# Altium PCB Light Panel.PcbDoc (part 2 of 2)
Units mm, origin at the board's own origin, x right, y up, seen from the top; angles counter-clockwise.
Board outline 300 x 185 mm, 2 copper layers (Top Layer, Bottom Layer), stack 1.671 mm thick; 278 components, 216 nets, 569 pads, 0 vias.
Unrouted connection lines stored in the file: 11.
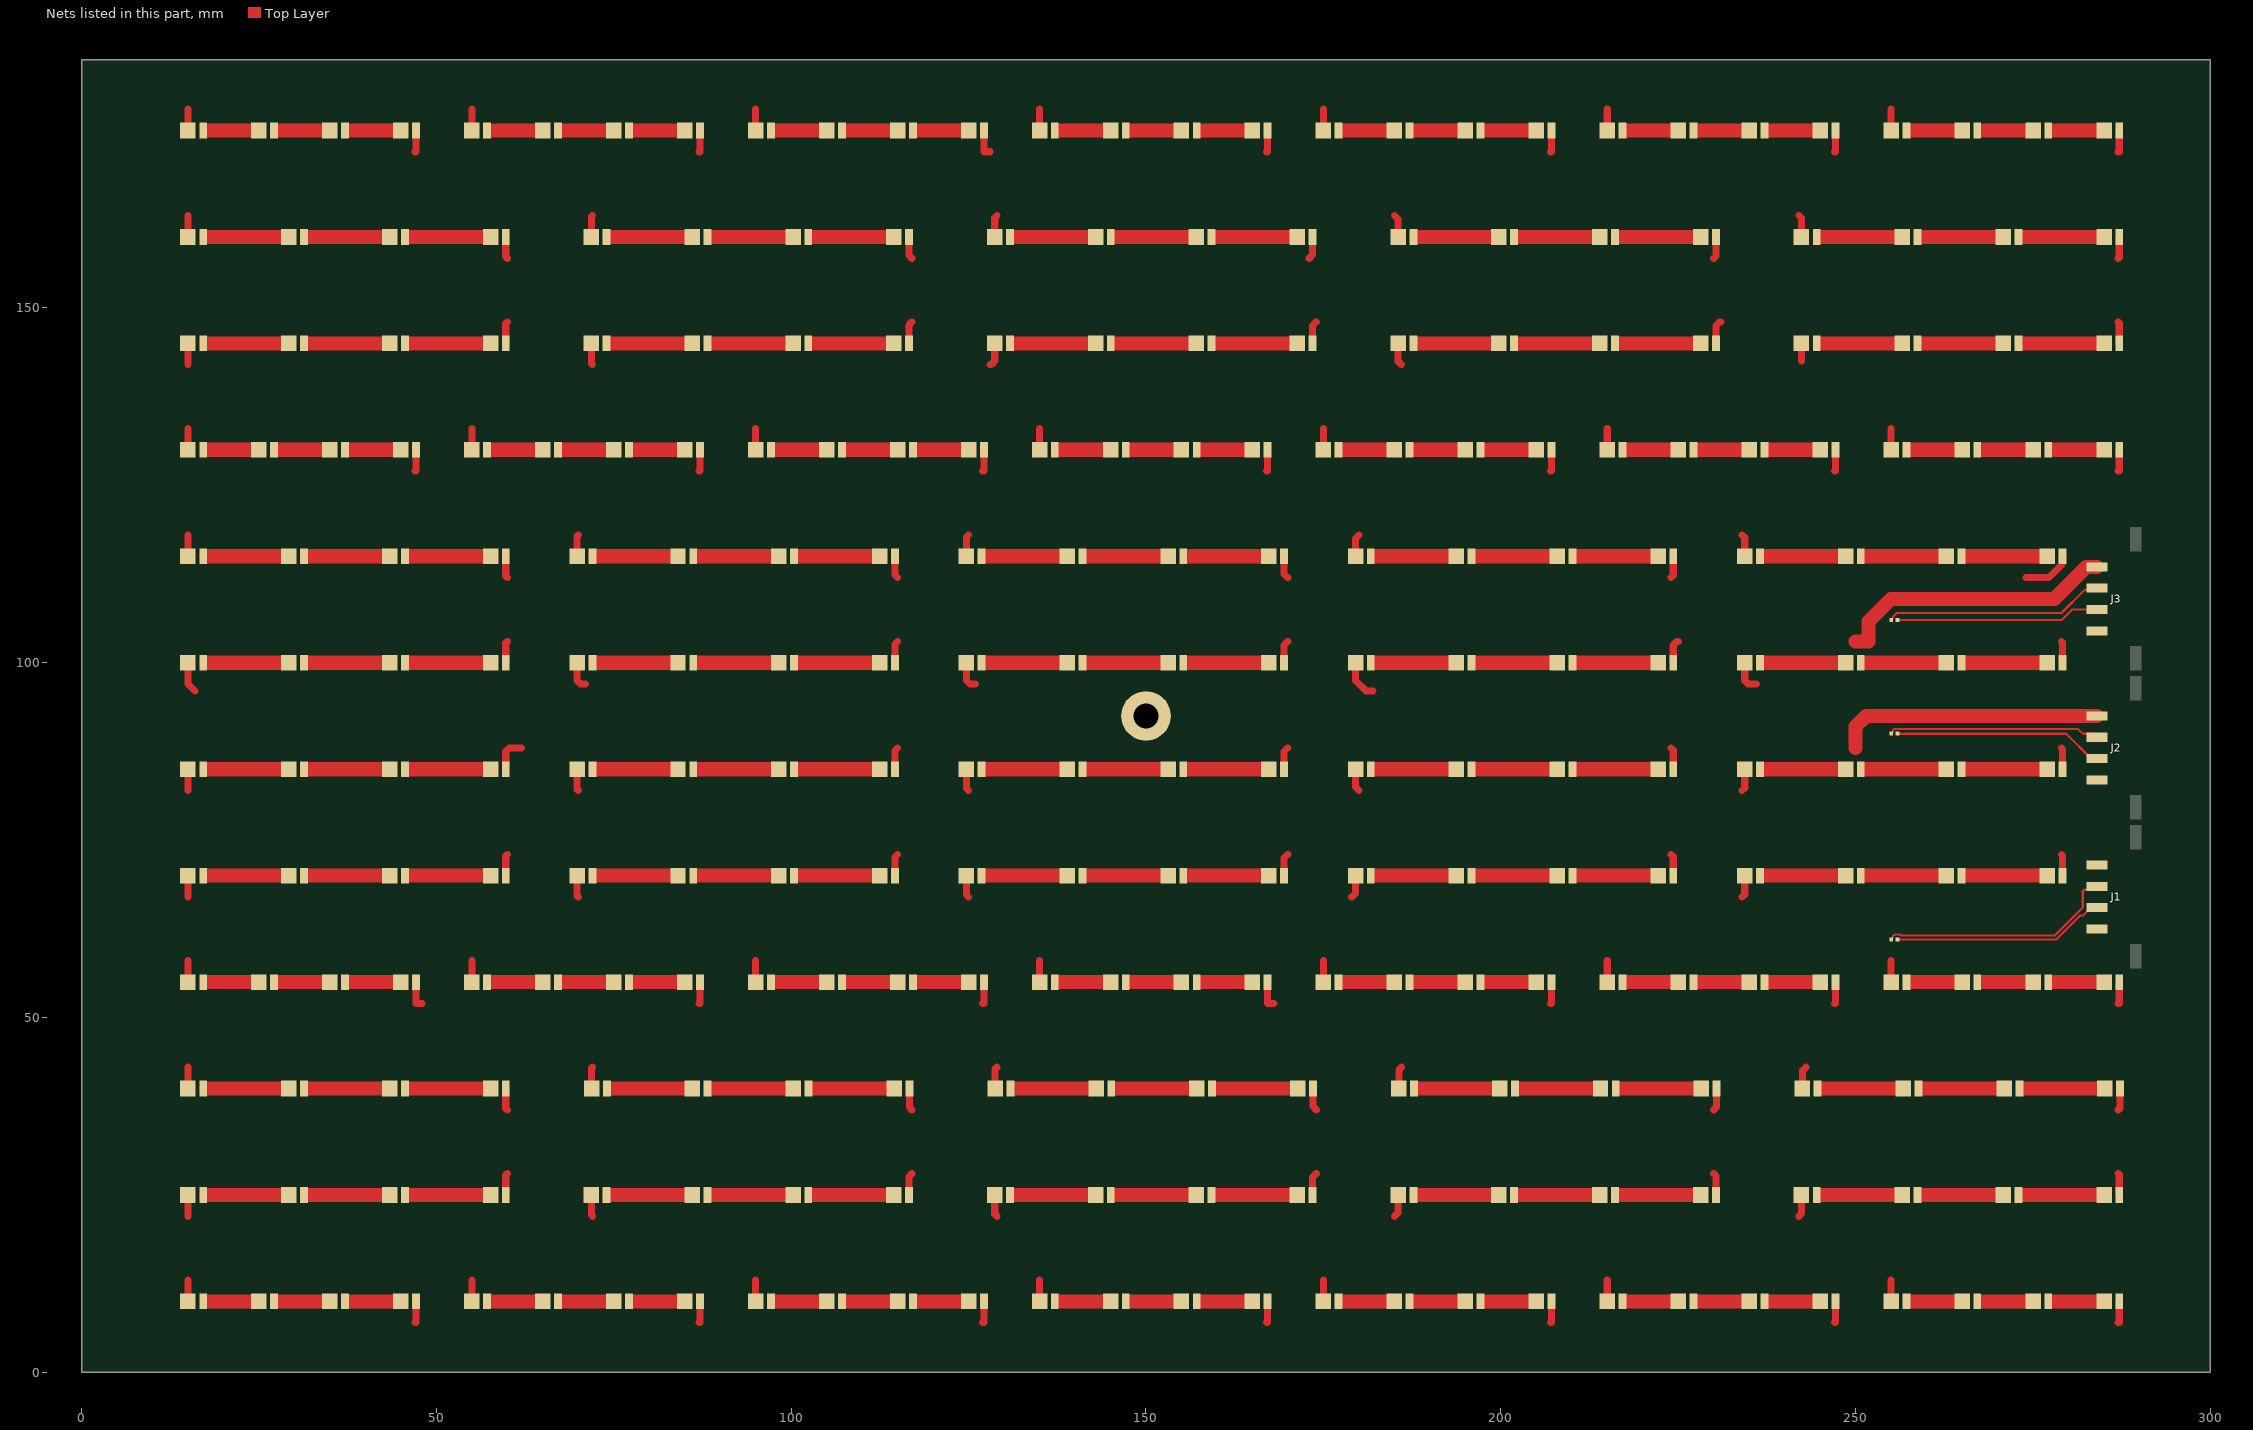
[diagram p2: the nets of this part, all layers, seen from the top]

## Part data
D1_WW1 D1_WW2 D1_WW3 D1_WW4 D1_WW5 D1_WW6 D1_WW7 D1_WW8 D1_WW9 D1_WW10 D1_WW11 D1_WW12 D1_WW13 D1_WW14 D1_WW15 D1_WW16 D1_WW17 D1_WW18 D1_WW19 D1_WW20 D2_WW1 D2_WW2 D2_WW3 D2_WW4 D2_WW5 D2_WW6 D2_WW7 D2_WW8 D2_WW9 D2_WW10 D2_WW11 D2_WW12 D2_WW13 D2_WW14 D2_WW15 D2_WW16 D2_WW17 D2_WW18 D2_WW19 D2_WW20 D3_WW1 D3_WW2 D3_WW3 D3_WW4 D3_WW5 D3_WW6 D3_WW7 D3_WW8 D3_WW9 D3_WW10 D3_WW11 D3_WW12 D3_WW13 D3_WW14 D3_WW15 D3_WW16 D3_WW17 D3_WW18 D3_WW19 D3_WW20 D4_WW1 D4_WW2 D4_WW3 D4_WW4 D4_WW5 D4_WW6 D4_WW7 D4_WW8 D4_WW9 D4_WW10 D4_WW11 D4_WW12 D4_WW13 D4_WW14 D4_WW15 D4_WW16 D4_WW17 D4_WW18 D4_WW19 D4_WW20: "LED", Color="White, Warm", CRI (Color Rendering Index)=90, Current - Max=200mA, Current - Test=65mA, Flux @ 25°C, Current - Test="30lm (29lm ~ 31lm)", Lumens/Watt @ Current - Test="165 lm/W", manufacturer="Samsung Semiconductor, Inc.", Supplier Device Package=2835, Supplier Part Number 1=1510-SPMWH1228MD7WAVUVKCT-ND, Voltage - Forward (Vf) (Typ)=2.8V, CCT (K)="3000K 3-Step MacAdam Ellipse", componentlink1description=Datasheet, componentlink1url=https://cdn.samsung.com/led/file/resource/2020/07/Data_Sheet_LM281B_Plus_Pro_VK_Rev.0.8.pdf, componentlink2description="DigiKey Link", componentlink2url=https://www.digikey.com/en/products/detail/samsung-semiconductor-inc/SPMWH1228MD7WAVUVK/12083623, Height - Seated (Max)="0.030\" (0.75mm)", lastupdated="21/03/2022 19:15:16", Lifecycle Status=Active, Minimum Order=1, Mounting Type="Surface Mount", packaging=TapeAndReel, Part Number=SPMWH1228MD7WAVUVK, Part Status=Active, partid=112, price=0.03, series=LM281B+, Size / Dimension="0.138\" L x 0.110\" W (3.50mm x 2.80mm)", Supplier 1=DigiKey, Viewing Angle=120°
D5_CW1 D5_CW2 D5_CW3 D5_CW4 D5_CW5 D5_CW6 D5_CW7 D5_CW8 D5_CW9 D5_CW10 D5_CW11 D5_CW12 D5_CW13 D5_CW14 D5_CW15 D5_CW16 D5_CW17 D5_CW18 D5_CW19 D5_CW20 D6_CW1 D6_CW2 D6_CW3 D6_CW4 D6_CW5 D6_CW6 D6_CW7 D6_CW8 D6_CW9 D6_CW10 D6_CW11 D6_CW12 D6_CW13 D6_CW14 D6_CW15 D6_CW16 D6_CW17 D6_CW18 D6_CW19 D6_CW20 D7_CW1 D7_CW2 D7_CW3 D7_CW4 D7_CW5 D7_CW6 D7_CW7 D7_CW8 D7_CW9 D7_CW10 D7_CW11 D7_CW12 D7_CW13 D7_CW14 D7_CW15 D7_CW16 D7_CW17 D7_CW18 D7_CW19 D7_CW20 D8_CW1 D8_CW2 D8_CW3 D8_CW4 D8_CW5 D8_CW6 D8_CW7 D8_CW8 D8_CW9 D8_CW10 D8_CW11 D8_CW12 D8_CW13 D8_CW14 D8_CW15 D8_CW16 D8_CW17 D8_CW18 D8_CW19 D8_CW20: "LED", Color="White, Cool", CRI (Color Rendering Index)=90, Current - Max=250mA, Current - Test=65mA, Device Package="1411 (3528 Metric)", Flux @ 25°C, Current - Test="33lm (32lm ~ 34lm)", Lumens/Watt @ Current - Test="181 lm/W", manufacturer="Samsung Semiconductor, Inc.", Supplier Device Package=1411, Supplier Part Number 1=1510-SPMWH1228MD7WAPMVLCT-ND, Voltage - Forward (Vf) (Typ)=2.8V, CCT (K)=6500K, componentlink1description=Datasheet, componentlink1url=https://media.digikey.com/pdf/Data%20Sheets/Samsung%20PDFs/LM281B_Plus%20Pro_VLrank_Rev_0.3_8-4-20.pdf, componentlink2description="DigiKey Link", componentlink2url=https://www.digikey.com/en/products/detail/samsung-semiconductor-inc/SPMWH1228MD7WAPMVL/13926354, Height - Seated (Max)="0.031\" (0.80mm)", lastupdated="21/03/2022 19:15:16", Lifecycle Status=Active, Minimum Order=1, Mounting Type="Surface Mount", Package / Case="1411 (3528 Metric)", packaging=TapeAndReel, Part Number=SPMWH1228MD7WAPMVL, Part Status=Active, partid=129, price=0.05, series=LM281B+, Size / Dimension="0.138\" L x 0.110\" W (3.50mm x 2.80mm)", Supplier 1=DigiKey, Viewing Angle=120°
D9_NW1 D9_NW2 D9_NW3 D9_NW4 D9_NW5 D9_NW6 D9_NW7 D9_NW8 D9_NW9 D9_NW10 D9_NW11 D9_NW12 D9_NW13 D9_NW14 D9_NW15 D9_NW16 D9_NW17 D9_NW18 D9_NW19 D9_NW20 D9_NW21 D9_NW22 D9_NW23 D9_NW24 D9_NW25 D9_NW26 D9_NW27 D9_NW28 D10_NW1 D10_NW2 D10_NW3 D10_NW4 D10_NW5 D10_NW6 D10_NW7 D10_NW8 D10_NW9 D10_NW10 D10_NW11 D10_NW12 D10_NW13 D10_NW14 D10_NW15 D10_NW16 D10_NW17 D10_NW18 D10_NW19 D10_NW20 D10_NW21 D10_NW22 D10_NW23 D10_NW24 D10_NW25 D10_NW26 D10_NW27 D10_NW28 D11_NW1 D11_NW2 D11_NW3 D11_NW4 D11_NW5 D11_NW6 D11_NW7 D11_NW8 D11_NW9 D11_NW10 D11_NW11 D11_NW12 D11_NW13 D11_NW14 D11_NW15 D11_NW16 D11_NW17 D11_NW18 D11_NW19 D11_NW20 D11_NW21 D11_NW22 D11_NW23 D11_NW24 D11_NW25 D11_NW26 D11_NW27 D11_NW28 D12_NW1 D12_NW2 D12_NW3 D12_NW4 D12_NW5 D12_NW6 D12_NW7 D12_NW8 D12_NW9 D12_NW10 D12_NW11 D12_NW12 D12_NW13 D12_NW14 D12_NW15 D12_NW16 D12_NW17 D12_NW18 D12_NW19 D12_NW20 D12_NW21 D12_NW22 D12_NW23 D12_NW24 D12_NW25 D12_NW26 D12_NW27 D12_NW28: "LED", Color="White, Neutral", CRI (Color Rendering Index)=90, Current - Max=250mA, Current - Test=65mA, Device Package="1411 (3528 Metric)", Flux @ 25°C, Current - Test="33lm (32lm ~ 34lm)", Lumens/Watt @ Current - Test="181 lm/W", manufacturer="Samsung Semiconductor, Inc.", Supplier Device Package=1411, Supplier Part Number 1=1510-SPMWH1228MD7WATMVLCT-ND, Voltage - Forward (Vf) (Typ)=2.8V, CCT (K)=4000K, componentlink1description=Datasheet, componentlink1url=https://media.digikey.com/pdf/Data%20Sheets/Samsung%20PDFs/LM281B_Plus%20Pro_VLrank_Rev_0.3_8-4-20.pdf, componentlink2description="DigiKey Link", componentlink2url=https://www.digikey.com/en/products/detail/samsung-semiconductor-inc/SPMWH1228MD7WATMVL/13926315, Height - Seated (Max)="0.031\" (0.80mm)", lastupdated="21/03/2022 19:15:15", Lifecycle Status=Active, Minimum Order=1, Mounting Type="Surface Mount", Package / Case="1411 (3528 Metric)", packaging=TapeAndReel, Part Number=SPMWH1228MD7WATMVL, Part Status=Active, partid=111, price=0.05, series=LM281B+, Size / Dimension="0.138\" L x 0.110\" W (3.50mm x 2.80mm)", Supplier 1=DigiKey, Viewing Angle=120°
J1 J2 J3: "CONN HEADER SMD R/A 4POS 3MM", Insulation Color=Black, manufacturer=Molex, Material Flammability Rating="UL94 V-0", Supplier Part Number 1=WM1892CT-ND, componentlink1description=Datasheet, componentlink1url=https://www.molex.com/pdm_docs/sd/436500412_sd.pdf, componentlink2description="DigiKey Link", componentlink2url=https://www.digikey.com/en/products/detail/molex/0436500412/3451041, Connector Type=Header, Contact Finish - Mating=Tin, Contact Finish - Post=Tin, Contact Finish Thickness - Mating="60.0µin (1.52µm)", Contact Material=Brass, Contact Shape=Square, Contact Type="Male Pin", Fastening Type="Locking Ramp", Features="Solder Retention", Insulation Height="0.172\" (4.37mm)", Insulation Material="Liquid Crystal Polymer (LCP), Glass Filled", lastupdated="21/03/2022 20:35:03", Lifecycle Status=Active, Minimum Order=1, Mounting Type="Surface Mount, Right Angle", Number of Positions=4, Number of Positions Loaded=All, Number of Rows=1, packaging=TapeAndReel, Part Number=0436500412, Part Status=Active, partid=134, Pitch - Mating="0.118\" (3.00mm)", price=1.64, series="Micro-Fit 3.0 43650", Shrouding="Shrouded - 4 Wall", Style="Board to Cable/Wire", Supplier 1=DigiKey, Termination=Solder
R1 R2 R3: library part NTCG104BF473FT1X, "THERMISTOR NTC 47KOHM 4485K 0402", B Value Tolerance=±1%, Device Package="0402 (1005 Metric)", manufacturer="TDK Corporation", Operating Temperature="-40°C ~ 125°C", Power - Max="100 mW", Supplier Part Number 1=445-174900-1-ND, B25/50=4485K, B25/85=4550K, componentlink1description=Datasheet, componentlink1url=https://product.tdk.com/info/en/catalog/datasheets/503021/tpd_commercial_ntc-thermistor_ntcg_en.pdf?ref_disty=digikey, componentlink2description="DigiKey Link", componentlink2url=https://www.digikey.com/en/products/detail/tdk-corporation/NTCG104BF473FT1X/5285693, lastupdated="21/03/2022 19:01:14", Lifecycle Status=Active, Minimum Order=1, Mounting Type="Surface Mount", Package / Case="0402 (1005 Metric)", packaging=TapeAndReel, Part Number=NTCG104BF473FT1X, Part Status=Active, partid=53, price=0.03, Resistance in Ohms @ 25°C=47k, Resistance Tolerance=±1%, series=NTCG, Supplier 1=DigiKey

## Free pads (board coordinates)
  round 7 hole 3.5 unplated: M(150,92.5)

## Nets (pads, with @x,y where several pads share a name; then routed paths per layer and width w, separated by ;. In a path a pad name is that pad's centre, name@x,y a point inside that pad or via, vN(x,y) a via of type N, cw(c..) or ccw(c..) an arc to the next point about the centre after c; other vN are vias at no path point)
NetD1_WW1_A: D1_WW1.A D1_WW2.A D1_WW3.A D1_WW4.A D1_WW5.A D1_WW6.A D1_WW7.A D1_WW8.A D1_WW9.A D1_WW10.A D1_WW11.A D1_WW12.A D1_WW13.A D1_WW14.A D1_WW15.A D1_WW16.A D1_WW17.A D1_WW18.A D1_WW19.A D1_WW20.A J2.1 pad.M | length 106.5
  Top Layer w1: D1_WW5.A@59.777,40 59.777,37.223 60,37 ; D1_WW8.A@59.777,85 59.777,87.5 60.277,88 62,88 ; D1_WW17.A@59.777,115 59.777,112.223 60,112 ; D1_WW20.A@59.777,145 59.777,147.777 60,148 ; D1_WW7.A@114.619,85 114.619,87.619 115,88 ; D1_WW10.A@114.619,115 114.619,112.381 115,112 ; D1_WW12.A@116.619,145 116.619,147.619 117,148 ; D1_WW4.A@116.652,40 116.652,37.348 117,37 ; D1_WW14.A@169.461,85 169.461,87.5 169.961,88 170,88 ; D1_WW9.A@169.461,115 169.461,112.5 169.961,112 170,112 ; D1_WW19.A@173.461,145 173.461,147.5 173.961,148 174,148 ; D1_WW3.A@173.527,40 173.527,37.473 174,37 ; 224,88 224.303,87.697 D1_WW6.A@224.303,85 ; 224,112 224.303,112.303 D1_WW16.A@224.303,115 ; 230,37 230.402,37.402 D1_WW2.A@230.402,40 ; D1_WW11.A@230.303,145 230.303,147.5 230.803,148 231,148 ; 274,112 277.256,112 279.09,113.834 279.09,114.945 D1_WW15.A@279.145,115 ; 279,88 279.145,87.855 D1_WW13.A@279.145,85 ; 287,37 287.277,37.277 D1_WW1.A@287.277,40 ; 287,148 287.145,147.855 D1_WW18.A@287.145,145
  Top Layer w2: 250,88 250,91 251.5,92.5 252,92.5 J2.1@284,92.5
NetD1_WW1_C: D1_WW1.C D2_WW1.A | length 11.5
  Top Layer w2: 273.632,40 D1_WW1.C@285.132,40
NetD1_WW2_C: D1_WW2.C D2_WW2.A | length 11.5
  Top Layer w2: 216.757,40 D1_WW2.C@228.257,40
NetD1_WW3_C: D1_WW3.C D2_WW3.A | length 11.5
  Top Layer w2: 159.882,40 D1_WW3.C@171.382,40
NetD1_WW4_C: D1_WW4.C D2_WW4.A | length 11.5
  Top Layer w2: 103.007,40 D1_WW4.C@114.507,40
NetD1_WW5_C: D1_WW5.C D2_WW5.A | length 11.5
  Top Layer w2: 46.132,40 D1_WW5.C@57.632,40
NetD1_WW6_C: D1_WW6.C D2_WW6.A | length 11.5
  Top Layer w2: 210.658,85 D1_WW6.C@222.158,85
NetD1_WW7_C: D1_WW7.C D2_WW7.A | length 11.5
  Top Layer w2: 100.974,85 D1_WW7.C@112.474,85
NetD1_WW8_C: D1_WW8.C D2_WW8.A | length 11.5
  Top Layer w2: 46.132,85 D1_WW8.C@57.632,85
NetD1_WW9_C: D1_WW9.C D2_WW9.A | length 11.5
  Top Layer w2: 155.816,115 D1_WW9.C@167.316,115
NetD1_WW10_C: D1_WW10.C D2_WW10.A | length 11.5
  Top Layer w2: 100.974,115 D1_WW10.C@112.474,115
NetD1_WW11_C: D1_WW11.C D2_WW11.A | length 11.5
  Top Layer w2: 216.658,145 D1_WW11.C@228.158,145
NetD1_WW12_C: D1_WW12.C D2_WW12.A | length 11.5
  Top Layer w2: 102.974,145 D1_WW12.C@114.474,145
NetD1_WW13_C: D1_WW13.C D2_WW13.A | length 11.5
  Top Layer w2: 265.5,85 D1_WW13.C@277,85
NetD1_WW14_C: D1_WW14.C D2_WW14.A | length 11.5
  Top Layer w2: 155.816,85 D1_WW14.C@167.316,85
NetD1_WW15_C: D1_WW15.C D2_WW15.A | length 11.5
  Top Layer w2: 265.5,115 D1_WW15.C@277,115
NetD1_WW16_C: D1_WW16.C D2_WW16.A | length 11.5
  Top Layer w2: 210.658,115 D1_WW16.C@222.158,115
NetD1_WW17_C: D1_WW17.C D2_WW17.A | length 11.5
  Top Layer w2: 46.132,115 D1_WW17.C@57.632,115
NetD1_WW18_C: D1_WW18.C D2_WW18.A | length 11.5
  Top Layer w2: 273.5,145 D1_WW18.C@285,145
NetD1_WW19_C: D1_WW19.C D2_WW19.A | length 11.5
  Top Layer w2: 159.816,145 D1_WW19.C@171.316,145
NetD1_WW20_C: D1_WW20.C D2_WW20.A | length 11.5
  Top Layer w2: 46.132,145 D1_WW20.C@57.632,145
NetD2_WW1_C: D2_WW1.C D3_WW1.A | length 11.3
  Top Layer w2: 259.632,40 D2_WW1.C@270.921,40
NetD2_WW2_C: D2_WW2.C D3_WW2.A | length 11.3
  Top Layer w2: 202.757,40 D2_WW2.C@214.046,40
NetD2_WW3_C: D2_WW3.C D3_WW3.A | length 11.3
  Top Layer w2: 145.882,40 D2_WW3.C@157.171,40
NetD2_WW4_C: D2_WW4.C D3_WW4.A | length 11.3
  Top Layer w2: 89.007,40 D2_WW4.C@100.296,40
NetD2_WW5_C: D2_WW5.C D3_WW5.A | length 11.3
  Top Layer w2: 32.132,40 D2_WW5.C@43.421,40
NetD2_WW6_C: D2_WW6.C D3_WW6.A | length 11.3
  Top Layer w2: 196.658,85 D2_WW6.C@207.947,85
NetD2_WW7_C: D2_WW7.C D3_WW7.A | length 11.3
  Top Layer w2: 86.974,85 D2_WW7.C@98.263,85
NetD2_WW8_C: D2_WW8.C D3_WW8.A | length 11.3
  Top Layer w2: 32.132,85 D2_WW8.C@43.421,85
NetD2_WW9_C: D2_WW9.C D3_WW9.A | length 11.3
  Top Layer w2: 141.816,115 D2_WW9.C@153.105,115
NetD2_WW10_C: D2_WW10.C D3_WW10.A | length 11.3
  Top Layer w2: 86.974,115 D2_WW10.C@98.263,115
NetD2_WW11_C: D2_WW11.C D3_WW11.A | length 11.3
  Top Layer w2: 202.658,145 D2_WW11.C@213.947,145
NetD2_WW12_C: D2_WW12.C D3_WW12.A | length 11.3
  Top Layer w2: 88.974,145 D2_WW12.C@100.263,145
NetD2_WW13_C: D2_WW13.C D3_WW13.A | length 11.3
  Top Layer w2: 251.5,85 D2_WW13.C@262.789,85
NetD2_WW14_C: D2_WW14.C D3_WW14.A | length 11.3
  Top Layer w2: 141.816,85 D2_WW14.C@153.105,85
NetD2_WW15_C: D2_WW15.C D3_WW15.A | length 11.3
  Top Layer w2: 251.5,115 D2_WW15.C@262.789,115
NetD2_WW16_C: D2_WW16.C D3_WW16.A | length 11.3
  Top Layer w2: 196.658,115 D2_WW16.C@207.947,115
NetD2_WW17_C: D2_WW17.C D3_WW17.A | length 11.3
  Top Layer w2: 32.132,115 D2_WW17.C@43.421,115
NetD2_WW18_C: D2_WW18.C D3_WW18.A | length 11.3
  Top Layer w2: 259.5,145 D2_WW18.C@270.789,145
NetD2_WW19_C: D2_WW19.C D3_WW19.A | length 11.3
  Top Layer w2: 145.816,145 D2_WW19.C@157.105,145
NetD2_WW20_C: D2_WW20.C D3_WW20.A | length 11.3
  Top Layer w2: 32.132,145 D2_WW20.C@43.421,145
NetD3_WW1_C: D3_WW1.C D4_WW1.A | length 11.6
  Top Layer w2: D4_WW1.A@245.09,40 D3_WW1.C@256.711,40
NetD3_WW2_C: D3_WW2.C D4_WW2.A | length 11.6
  Top Layer w2: D4_WW2.A@188.215,40 D3_WW2.C@199.836,40
NetD3_WW3_C: D3_WW3.C D4_WW3.A | length 11.6
  Top Layer w2: D4_WW3.A@131.34,40 D3_WW3.C@142.961,40
NetD3_WW4_C: D3_WW4.C D4_WW4.A | length 11.6
  Top Layer w2: D4_WW4.A@74.465,40 D3_WW4.C@86.086,40
NetD3_WW5_C: D3_WW5.C D4_WW5.A | length 11.6
  Top Layer w2: D4_WW5.A@17.59,40 D3_WW5.C@29.211,40
NetD3_WW6_C: D3_WW6.C D4_WW6.A | length 11.6
  Top Layer w2: D4_WW6.A@182.116,85 D3_WW6.C@193.737,85
NetD3_WW7_C: D3_WW7.C D4_WW7.A | length 11.6
  Top Layer w2: D4_WW7.A@72.432,85 D3_WW7.C@84.053,85
NetD3_WW8_C: D3_WW8.C D4_WW8.A | length 11.6
  Top Layer w2: D4_WW8.A@17.59,85 D3_WW8.C@29.211,85
NetD3_WW9_C: D3_WW9.C D4_WW9.A | length 11.6
  Top Layer w2: D4_WW9.A@127.274,115 D3_WW9.C@138.895,115
NetD3_WW10_C: D3_WW10.C D4_WW10.A | length 11.6
  Top Layer w2: D4_WW10.A@72.432,115 D3_WW10.C@84.053,115
NetD3_WW11_C: D3_WW11.C D4_WW11.A | length 11.6
  Top Layer w2: D4_WW11.A@188.116,145 D3_WW11.C@199.737,145
NetD3_WW12_C: D3_WW12.C D4_WW12.A | length 11.6
  Top Layer w2: D4_WW12.A@74.432,145 D3_WW12.C@86.053,145
NetD3_WW13_C: D3_WW13.C D4_WW13.A | length 11.6
  Top Layer w2: D4_WW13.A@236.958,85 D3_WW13.C@248.579,85
NetD3_WW14_C: D3_WW14.C D4_WW14.A | length 11.6
  Top Layer w2: D4_WW14.A@127.274,85 D3_WW14.C@138.895,85
NetD3_WW15_C: D3_WW15.C D4_WW15.A | length 11.6
  Top Layer w2: D4_WW15.A@236.958,115 D3_WW15.C@248.579,115
NetD3_WW16_C: D3_WW16.C D4_WW16.A | length 11.6
  Top Layer w2: D4_WW16.A@182.116,115 D3_WW16.C@193.737,115
NetD3_WW17_C: D3_WW17.C D4_WW17.A | length 11.6
  Top Layer w2: D4_WW17.A@17.59,115 D3_WW17.C@29.211,115
NetD3_WW18_C: D3_WW18.C D4_WW18.A | length 11.6
  Top Layer w2: D4_WW18.A@244.958,145 D3_WW18.C@256.579,145
NetD3_WW19_C: D3_WW19.C D4_WW19.A | length 11.6
  Top Layer w2: D4_WW19.A@131.274,145 D3_WW19.C@142.895,145
NetD3_WW20_C: D3_WW20.C D4_WW20.A | length 11.6
  Top Layer w2: D4_WW20.A@17.59,145 D3_WW20.C@29.211,145
NetD4_WW1_C: D4_WW1.C D4_WW2.C D4_WW3.C D4_WW4.C D4_WW5.C D4_WW6.C D4_WW7.C D4_WW8.C D4_WW9.C D4_WW10.C D4_WW11.C D4_WW12.C D4_WW13.C D4_WW14.C D4_WW15.C D4_WW16.C D4_WW17.C D4_WW18.C D4_WW19.C D4_WW20.C J2.4 | length 61.8
  Top Layer w1: D4_WW5.C@15,40 15,43 ; 15,82 D4_WW8.C@15,85 ; D4_WW17.C@15,115 15,118 ; 15,142 D4_WW20.C@15,145 ; D4_WW7.C@69.842,85 69.842,82.158 70,82 ; D4_WW10.C@69.842,115 69.842,117.842 70,118 ; D4_WW12.C@71.842,145 71.842,142.158 72,142 ; D4_WW4.C@71.875,40 71.875,42.875 72,43 ; D4_WW14.C@124.684,85 124.684,82.316 125,82 ; D4_WW9.C@124.684,115 124.684,117.684 125,118 ; 128,142 128.184,142 128.684,142.5 D4_WW19.C@128.684,145 ; D4_WW3.C@128.75,40 128.75,42.75 129,43 ; D4_WW6.C@179.526,85 179.526,82.474 180,82 ; D4_WW16.C@179.526,115 179.526,117.526 180,118 ; D4_WW11.C@185.526,145 185.526,142.474 186,142 ; D4_WW2.C@185.625,40 185.625,42.625 186,43 ; 234,82 234.368,82.368 D4_WW13.C@234.368,85 ; 234,118 234.368,117.632 D4_WW15.C@234.368,115 ; 242.368,142.5 D4_WW18.C@242.368,145 ; D4_WW1.C@242.5,40 242.5,42.5 243,43
NetD5_CW1_A: D5_CW1.A D5_CW2.A D5_CW3.A D5_CW4.A D5_CW5.A D5_CW6.A D5_CW7.A D5_CW8.A D5_CW9.A D5_CW10.A D5_CW11.A D5_CW12.A D5_CW13.A D5_CW14.A D5_CW15.A D5_CW16.A D5_CW17.A D5_CW18.A D5_CW19.A D5_CW20.A J3.1 | length 103
  Top Layer w1: D5_CW5.A@59.777,25 59.777,27.777 60,28 ; D5_CW20.A@59.777,70 59.777,72.777 60,73 ; D5_CW9.A@59.777,100 59.777,102.777 60,103 ; D5_CW16.A@59.777,160 59.777,157.223 60,157 ; D5_CW19.A@114.619,70 114.619,72.619 115,73 ; D5_CW12.A@114.619,100 114.619,102.619 115,103 ; D5_CW4.A@116.619,25 116.619,27.619 117,28 ; D5_CW15.A@116.619,160 116.619,157.381 117,157 ; D5_CW18.A@169.461,70 169.461,72.5 169.961,73 170,73 ; D5_CW10.A@169.461,100 169.461,102.5 169.961,103 170,103 ; 173,157 173.461,157.461 D5_CW13.A@173.461,160 ; D5_CW3.A@173.461,25 173.461,27.5 173.961,28 174,28 ; 224,73 224.303,72.697 D5_CW17.A@224.303,70 ; D5_CW7.A@224.303,100 224.303,102.5 224.803,103 225,103 ; 230,28 230.303,27.697 D5_CW2.A@230.303,25 ; 230,157 230.303,157.303 D5_CW14.A@230.303,160 ; 279,73 279.145,72.855 D5_CW6.A@279.145,70 ; 279,103 279.145,102.855 D5_CW8.A@279.145,100 ; 287,28 287.145,27.855 D5_CW1.A@287.145,25 ; 287,157 287.145,157.145 D5_CW11.A@287.145,160
  Top Layer w2: 250,103 251.828,103 251.828,105.828 255,109 278,109 282.5,113.5 J3.1@284,113.5
NetD5_CW1_C: D5_CW1.C D6_CW1.A | length 11.5
  Top Layer w2: 273.5,25 D5_CW1.C@285,25
NetD5_CW2_C: D5_CW2.C D6_CW2.A | length 11.5
  Top Layer w2: 216.658,25 D5_CW2.C@228.158,25
NetD5_CW3_C: D5_CW3.C D6_CW3.A | length 11.5
  Top Layer w2: 159.816,25 D5_CW3.C@171.316,25
NetD5_CW4_C: D5_CW4.C D6_CW4.A | length 11.5
  Top Layer w2: 102.974,25 D5_CW4.C@114.474,25
NetD5_CW5_C: D5_CW5.C D6_CW5.A | length 11.5
  Top Layer w2: 46.132,25 D5_CW5.C@57.632,25
NetD5_CW6_C: D5_CW6.C D6_CW6.A | length 11.5
  Top Layer w2: 265.5,70 D5_CW6.C@277,70
NetD5_CW7_C: D5_CW7.C D6_CW7.A | length 11.5
  Top Layer w2: 210.658,100 D5_CW7.C@222.158,100
NetD5_CW8_C: D5_CW8.C D6_CW8.A | length 11.5
  Top Layer w2: 265.5,100 D5_CW8.C@277,100
NetD5_CW9_C: D5_CW9.C D6_CW9.A | length 11.5
  Top Layer w2: 46.132,100 D5_CW9.C@57.632,100
NetD5_CW10_C: D5_CW10.C D6_CW10.A | length 11.5
  Top Layer w2: 155.816,100 D5_CW10.C@167.316,100
NetD5_CW11_C: D5_CW11.C D6_CW11.A | length 11.5
  Top Layer w2: 273.5,160 D5_CW11.C@285,160
NetD5_CW12_C: D5_CW12.C D6_CW12.A | length 11.5
  Top Layer w2: 100.974,100 D5_CW12.C@112.474,100
NetD5_CW13_C: D5_CW13.C D6_CW13.A | length 11.5
  Top Layer w2: 159.816,160 D5_CW13.C@171.316,160
NetD5_CW14_C: D5_CW14.C D6_CW14.A | length 11.5
  Top Layer w2: 216.658,160 D5_CW14.C@228.158,160
NetD5_CW15_C: D5_CW15.C D6_CW15.A | length 11.5
  Top Layer w2: 102.974,160 D5_CW15.C@114.474,160
NetD5_CW16_C: D5_CW16.C D6_CW16.A | length 11.5
  Top Layer w2: 46.132,160 D5_CW16.C@57.632,160
NetD5_CW17_C: D5_CW17.C D6_CW17.A | length 11.5
  Top Layer w2: 210.658,70 D5_CW17.C@222.158,70
NetD5_CW18_C: D5_CW18.C D6_CW18.A | length 11.5
  Top Layer w2: 155.816,70 D5_CW18.C@167.316,70
NetD5_CW19_C: D5_CW19.C D6_CW19.A | length 11.5
  Top Layer w2: 100.974,70 D5_CW19.C@112.474,70
NetD5_CW20_C: D5_CW20.C D6_CW20.A | length 11.5
  Top Layer w2: 46.132,70 D5_CW20.C@57.632,70
NetD6_CW1_C: D6_CW1.C D7_CW1.A | length 11.3
  Top Layer w2: 259.5,25 D6_CW1.C@270.789,25
NetD6_CW2_C: D6_CW2.C D7_CW2.A | length 11.3
  Top Layer w2: 202.658,25 D6_CW2.C@213.947,25
NetD6_CW3_C: D6_CW3.C D7_CW3.A | length 11.3
  Top Layer w2: 145.816,25 D6_CW3.C@157.105,25
NetD6_CW4_C: D6_CW4.C D7_CW4.A | length 11.3
  Top Layer w2: 88.974,25 D6_CW4.C@100.263,25
NetD6_CW5_C: D6_CW5.C D7_CW5.A | length 11.3
  Top Layer w2: 32.132,25 D6_CW5.C@43.421,25
NetD6_CW6_C: D6_CW6.C D7_CW6.A | length 11.3
  Top Layer w2: 251.5,70 D6_CW6.C@262.789,70
NetD6_CW7_C: D6_CW7.C D7_CW7.A | length 11.3
  Top Layer w2: 196.658,100 D6_CW7.C@207.947,100
NetD6_CW8_C: D6_CW8.C D7_CW8.A | length 11.3
  Top Layer w2: 251.5,100 D6_CW8.C@262.789,100
NetD6_CW9_C: D6_CW9.C D7_CW9.A | length 11.3
  Top Layer w2: 32.132,100 D6_CW9.C@43.421,100
NetD6_CW10_C: D6_CW10.C D7_CW10.A | length 11.3
  Top Layer w2: 141.816,100 D6_CW10.C@153.105,100
NetD6_CW11_C: D6_CW11.C D7_CW11.A | length 11.3
  Top Layer w2: 259.5,160 D6_CW11.C@270.789,160
NetD6_CW12_C: D6_CW12.C D7_CW12.A | length 11.3
  Top Layer w2: 86.974,100 D6_CW12.C@98.263,100
NetD6_CW13_C: D6_CW13.C D7_CW13.A | length 11.3
  Top Layer w2: 145.816,160 D6_CW13.C@157.105,160
NetD6_CW14_C: D6_CW14.C D7_CW14.A | length 11.3
  Top Layer w2: 202.658,160 D6_CW14.C@213.947,160
NetD6_CW15_C: D6_CW15.C D7_CW15.A | length 11.3
  Top Layer w2: 88.974,160 D6_CW15.C@100.263,160
NetD6_CW16_C: D6_CW16.C D7_CW16.A | length 11.3
  Top Layer w2: 32.132,160 D6_CW16.C@43.421,160
NetD6_CW17_C: D6_CW17.C D7_CW17.A | length 11.3
  Top Layer w2: 196.658,70 D6_CW17.C@207.947,70
NetD6_CW18_C: D6_CW18.C D7_CW18.A | length 11.3
  Top Layer w2: 141.816,70 D6_CW18.C@153.105,70
NetD6_CW19_C: D6_CW19.C D7_CW19.A | length 11.3
  Top Layer w2: 86.974,70 D6_CW19.C@98.263,70
NetD6_CW20_C: D6_CW20.C D7_CW20.A | length 11.3
  Top Layer w2: 32.132,70 D6_CW20.C@43.421,70
NetD7_CW1_C: D7_CW1.C D8_CW1.A | length 11.6
  Top Layer w2: D8_CW1.A@244.958,25 D7_CW1.C@256.579,25
NetD7_CW2_C: D7_CW2.C D8_CW2.A | length 11.6
  Top Layer w2: D8_CW2.A@188.116,25 D7_CW2.C@199.737,25
NetD7_CW3_C: D7_CW3.C D8_CW3.A | length 11.6
  Top Layer w2: D8_CW3.A@131.274,25 D7_CW3.C@142.895,25
NetD7_CW4_C: D7_CW4.C D8_CW4.A | length 11.6
  Top Layer w2: D8_CW4.A@74.432,25 D7_CW4.C@86.053,25
NetD7_CW5_C: D7_CW5.C D8_CW5.A | length 11.6
  Top Layer w2: D8_CW5.A@17.59,25 D7_CW5.C@29.211,25
NetD7_CW6_C: D7_CW6.C D8_CW6.A | length 11.6
  Top Layer w2: D8_CW6.A@236.958,70 D7_CW6.C@248.579,70
NetD7_CW7_C: D7_CW7.C D8_CW7.A | length 11.6
  Top Layer w2: D8_CW7.A@182.116,100 D7_CW7.C@193.737,100
NetD7_CW8_C: D7_CW8.C D8_CW8.A | length 11.6
  Top Layer w2: D8_CW8.A@236.958,100 D7_CW8.C@248.579,100
NetD7_CW9_C: D7_CW9.C D8_CW9.A | length 11.6
  Top Layer w2: D8_CW9.A@17.59,100 D7_CW9.C@29.211,100
NetD7_CW10_C: D7_CW10.C D8_CW10.A | length 11.6
  Top Layer w2: D8_CW10.A@127.274,100 D7_CW10.C@138.895,100
NetD7_CW11_C: D7_CW11.C D8_CW11.A | length 11.6
  Top Layer w2: D8_CW11.A@244.958,160 D7_CW11.C@256.579,160
NetD7_CW12_C: D7_CW12.C D8_CW12.A | length 11.6
  Top Layer w2: D8_CW12.A@72.432,100 D7_CW12.C@84.053,100
NetD7_CW13_C: D7_CW13.C D8_CW13.A | length 11.6
  Top Layer w2: D8_CW13.A@131.274,160 D7_CW13.C@142.895,160
NetD7_CW14_C: D7_CW14.C D8_CW14.A | length 11.6
  Top Layer w2: D8_CW14.A@188.116,160 D7_CW14.C@199.737,160
NetD7_CW15_C: D7_CW15.C D8_CW15.A | length 11.6
  Top Layer w2: D8_CW15.A@74.432,160 D7_CW15.C@86.053,160
NetD7_CW16_C: D7_CW16.C D8_CW16.A | length 11.6
  Top Layer w2: D8_CW16.A@17.59,160 D7_CW16.C@29.211,160
NetD7_CW17_C: D7_CW17.C D8_CW17.A | length 11.6
  Top Layer w2: D8_CW17.A@182.116,70 D7_CW17.C@193.737,70
NetD7_CW18_C: D7_CW18.C D8_CW18.A | length 11.6
  Top Layer w2: D8_CW18.A@127.274,70 D7_CW18.C@138.895,70
NetD7_CW19_C: D7_CW19.C D8_CW19.A | length 11.6
  Top Layer w2: D8_CW19.A@72.432,70 D7_CW19.C@84.053,70
NetD7_CW20_C: D7_CW20.C D8_CW20.A | length 11.6
  Top Layer w2: D8_CW20.A@17.59,70 D7_CW20.C@29.211,70
NetD8_CW1_C: D8_CW1.C D8_CW2.C D8_CW3.C D8_CW4.C D8_CW5.C D8_CW6.C D8_CW7.C D8_CW8.C D8_CW9.C D8_CW10.C D8_CW11.C D8_CW12.C D8_CW13.C D8_CW14.C D8_CW15.C D8_CW16.C D8_CW17.C D8_CW18.C D8_CW19.C D8_CW20.C J3.4 | length 69
  Top Layer w1: 15,22 D8_CW5.C@15,25 ; 15,67 D8_CW20.C@15,70 ; D8_CW9.C@15,100 15,97 16,96 ; D8_CW16.C@15,160 15,163 ; D8_CW19.C@69.842,70 69.842,67.158 70,67 ; D8_CW12.C@69.842,100 69.842,97.5 70.342,97 71,97 ; D8_CW4.C@71.842,25 71.842,22.158 72,22 ; D8_CW15.C@71.842,160 71.842,162.842 72,163 ; D8_CW18.C@124.684,70 124.684,67.316 125,67 ; D8_CW10.C@124.684,100 124.684,97.5 125.184,97 126,97 ; D8_CW3.C@128.684,25 128.684,22.316 129,22 ; D8_CW13.C@128.684,160 128.684,162.684 129,163 ; 179,67 179.026,67 179.526,67.5 D8_CW17.C@179.526,70 ; D8_CW7.C@179.526,100 179.526,97.5 181.026,96 182,96 ; 185,22 185.026,22 185.526,22.5 D8_CW2.C@185.526,25 ; 185,163 185.026,163 185.526,162.5 D8_CW14.C@185.526,160 ; 234,67 234.368,67.368 D8_CW6.C@234.368,70 ; D8_CW8.C@234.368,100 234.368,97.5 234.868,97 236,97 ; 242,22 242.368,22.368 D8_CW1.C@242.368,25 ; 242,163 242.368,162.632 D8_CW11.C@242.368,160
NetD9_NW1_A: D9_NW1.A D9_NW2.A D9_NW3.A D9_NW4.A D9_NW5.A D9_NW6.A D9_NW7.A D9_NW8.A D9_NW9.A D9_NW10.A D9_NW11.A D9_NW12.A D9_NW13.A D9_NW14.A D9_NW15.A D9_NW16.A D9_NW17.A D9_NW18.A D9_NW19.A D9_NW20.A D9_NW21.A D9_NW22.A D9_NW23.A D9_NW24.A D9_NW25.A D9_NW26.A D9_NW27.A D9_NW28.A J1.1 | length 90.2
  Top Layer w1: 47,7 47.145,7 D9_NW7.A@47.145,10 ; 47,127 47.145,127 D9_NW15.A@47.145,130 ; 47,172 47.145,172 D9_NW14.A@47.145,175 ; D9_NW13.A@47.145,55 47.145,52 48,52 ; 87,7 87.145,7 D9_NW6.A@87.145,10 ; 87,52 87.145,52 D9_NW12.A@87.145,55 ; 87,127 87.145,127 D9_NW16.A@87.145,130 ; 87,172 87.145,172 D9_NW28.A@87.145,175 ; 127,7 127.145,7 D9_NW5.A@127.145,10 ; 127,52 127.145,52 D9_NW23.A@127.145,55 ; 127,127 127.145,127 D9_NW17.A@127.145,130 ; D9_NW9.A@127.145,175 127.145,172 128,172 ; 167,7 167.145,7 D9_NW4.A@167.145,10 ; 167,127 167.145,127 D9_NW18.A@167.145,130 ; 167,172 167.145,172 D9_NW22.A@167.145,175 ; D9_NW25.A@167.145,55 167.145,52 168,52 ; 207,7 207.145,7 D9_NW3.A@207.145,10 ; 207,52 207.145,52 D9_NW27.A@207.145,55 ; 207,127 207.145,127 D9_NW19.A@207.145,130 ; 207,172 207.145,172 D9_NW8.A@207.145,175 ; 247,7 247.145,7 D9_NW2.A@247.145,10 ; 247,52 247.145,52 D9_NW10.A@247.145,55 ; 247,127 247.145,127 D9_NW20.A@247.145,130 ; 247,172 247.145,172 D9_NW24.A@247.145,175 ; 287,7 287.145,7 D9_NW1.A@287.145,10 ; 287,52 287.145,52 D9_NW26.A@287.145,55 ; 287,127 287.145,127 D9_NW21.A@287.145,130 ; 287,172 287.145,172 D9_NW11.A@287.145,175
NetD9_NW1_C: D9_NW1.C D10_NW1.A | length 7.2
  Top Layer w2: 277.75,10 D9_NW1.C@285,10
NetD9_NW2_C: D9_NW2.C D10_NW2.A | length 7.2
  Top Layer w2: 237.75,10 D9_NW2.C@245,10
NetD9_NW3_C: D9_NW3.C D10_NW3.A | length 7.2
  Top Layer w2: 197.75,10 D9_NW3.C@205,10
NetD9_NW4_C: D9_NW4.C D10_NW4.A | length 7.2
  Top Layer w2: 157.75,10 D9_NW4.C@165,10
NetD9_NW5_C: D9_NW5.C D10_NW5.A | length 7.2
  Top Layer w2: 117.75,10 D9_NW5.C@125,10
NetD9_NW6_C: D9_NW6.C D10_NW6.A | length 7.2
  Top Layer w2: 77.75,10 D9_NW6.C@85,10
NetD9_NW7_C: D9_NW7.C D10_NW7.A | length 7.2
  Top Layer w2: 37.75,10 D9_NW7.C@45,10
NetD9_NW8_C: D9_NW8.C D10_NW8.A | length 7.2
  Top Layer w2: 197.75,175 D9_NW8.C@205,175
NetD9_NW9_C: D9_NW9.C D10_NW9.A | length 7.2
  Top Layer w2: 117.75,175 D9_NW9.C@125,175
NetD9_NW10_C: D9_NW10.C D10_NW10.A | length 7.2
  Top Layer w2: 237.75,55 D9_NW10.C@245,55
NetD9_NW11_C: D9_NW11.C D10_NW11.A | length 7.2
  Top Layer w2: 277.75,175 D9_NW11.C@285,175
NetD9_NW12_C: D9_NW12.C D10_NW12.A | length 7.2
  Top Layer w2: 77.75,55 D9_NW12.C@85,55
NetD9_NW13_C: D9_NW13.C D10_NW13.A | length 7.2
  Top Layer w2: 37.75,55 D9_NW13.C@45,55
NetD9_NW14_C: D9_NW14.C D10_NW14.A | length 7.2
  Top Layer w2: 37.75,175 D9_NW14.C@45,175
NetD9_NW15_C: D9_NW15.C D10_NW15.A | length 7.2
  Top Layer w2: 37.75,130 D9_NW15.C@45,130
NetD9_NW16_C: D9_NW16.C D10_NW16.A | length 7.2
  Top Layer w2: 77.75,130 D9_NW16.C@85,130
NetD9_NW17_C: D9_NW17.C D10_NW17.A | length 7.2
  Top Layer w2: 117.75,130 D9_NW17.C@125,130
NetD9_NW18_C: D9_NW18.C D10_NW18.A | length 7.2
  Top Layer w2: 157.75,130 D9_NW18.C@165,130
NetD9_NW19_C: D9_NW19.C D10_NW19.A | length 7.2
  Top Layer w2: 197.75,130 D9_NW19.C@205,130
NetD9_NW20_C: D9_NW20.C D10_NW20.A | length 7.2
  Top Layer w2: 237.75,130 D9_NW20.C@245,130
NetD9_NW21_C: D9_NW21.C D10_NW21.A | length 7.2
  Top Layer w2: 277.75,130 D9_NW21.C@285,130
NetD9_NW22_C: D9_NW22.C D10_NW22.A | length 7.2
  Top Layer w2: 157.75,175 D9_NW22.C@165,175
NetD9_NW23_C: D9_NW23.C D10_NW23.A | length 7.2
  Top Layer w2: 117.75,55 D9_NW23.C@125,55
NetD9_NW24_C: D9_NW24.C D10_NW24.A | length 7.2
  Top Layer w2: 237.75,175 D9_NW24.C@245,175
NetD9_NW25_C: D9_NW25.C D10_NW25.A | length 7.2
  Top Layer w2: 157.75,55 D9_NW25.C@165,55
NetD9_NW26_C: D9_NW26.C D10_NW26.A | length 7.2
  Top Layer w2: 277.75,55 D9_NW26.C@285,55
NetD9_NW27_C: D9_NW27.C D10_NW27.A | length 7.2
  Top Layer w2: 197.75,55 D9_NW27.C@205,55
NetD9_NW28_C: D9_NW28.C D10_NW28.A | length 7.2
  Top Layer w2: 77.75,175 D9_NW28.C@85,175
NetD10_NW1_C: D10_NW1.C D11_NW1.A | length 7.2
  Top Layer w2: 267.75,10 D10_NW1.C@275,10
NetD10_NW2_C: D10_NW2.C D11_NW2.A | length 7.2
  Top Layer w2: 227.75,10 D10_NW2.C@235,10
NetD10_NW3_C: D10_NW3.C D11_NW3.A | length 7.2
  Top Layer w2: 187.75,10 D10_NW3.C@195,10
NetD10_NW4_C: D10_NW4.C D11_NW4.A | length 7.2
  Top Layer w2: 147.75,10 D10_NW4.C@155,10
NetD10_NW5_C: D10_NW5.C D11_NW5.A | length 7.2
  Top Layer w2: 107.75,10 D10_NW5.C@115,10
NetD10_NW6_C: D10_NW6.C D11_NW6.A | length 7.2
  Top Layer w2: 67.75,10 D10_NW6.C@75,10
NetD10_NW7_C: D10_NW7.C D11_NW7.A | length 7.2
  Top Layer w2: 27.75,10 D10_NW7.C@35,10
NetD10_NW8_C: D10_NW8.C D11_NW8.A | length 7.2
  Top Layer w2: 187.75,175 D10_NW8.C@195,175
NetD10_NW9_C: D10_NW9.C D11_NW9.A | length 7.2
  Top Layer w2: 107.75,175 D10_NW9.C@115,175
NetD10_NW10_C: D10_NW10.C D11_NW10.A | length 7.2
  Top Layer w2: 227.75,55 D10_NW10.C@235,55
NetD10_NW11_C: D10_NW11.C D11_NW11.A | length 7.2
  Top Layer w2: 267.75,175 D10_NW11.C@275,175
NetD10_NW12_C: D10_NW12.C D11_NW12.A | length 7.2
  Top Layer w2: 67.75,55 D10_NW12.C@75,55
NetD10_NW13_C: D10_NW13.C D11_NW13.A | length 7.2
  Top Layer w2: 27.75,55 D10_NW13.C@35,55
NetD10_NW14_C: D10_NW14.C D11_NW14.A | length 7.2
  Top Layer w2: 27.75,175 D10_NW14.C@35,175
NetD10_NW15_C: D10_NW15.C D11_NW15.A | length 7.2
  Top Layer w2: 27.75,130 D10_NW15.C@35,130
NetD10_NW16_C: D10_NW16.C D11_NW16.A | length 7.2
  Top Layer w2: 67.75,130 D10_NW16.C@75,130
NetD10_NW17_C: D10_NW17.C D11_NW17.A | length 7.2
  Top Layer w2: 107.75,130 D10_NW17.C@115,130
NetD10_NW18_C: D10_NW18.C D11_NW18.A | length 7.2
  Top Layer w2: 147.75,130 D10_NW18.C@155,130
NetD10_NW19_C: D10_NW19.C D11_NW19.A | length 7.2
  Top Layer w2: 187.75,130 D10_NW19.C@195,130
NetD10_NW20_C: D10_NW20.C D11_NW20.A | length 7.2
  Top Layer w2: 227.75,130 D10_NW20.C@235,130
NetD10_NW21_C: D10_NW21.C D11_NW21.A | length 7.2
  Top Layer w2: 267.75,130 D10_NW21.C@275,130
NetD10_NW22_C: D10_NW22.C D11_NW22.A | length 7.2
  Top Layer w2: 147.75,175 D10_NW22.C@155,175
NetD10_NW23_C: D10_NW23.C D11_NW23.A | length 7.2
  Top Layer w2: 107.75,55 D10_NW23.C@115,55
NetD10_NW24_C: D10_NW24.C D11_NW24.A | length 7.2
  Top Layer w2: 227.75,175 D10_NW24.C@235,175
NetD10_NW25_C: D10_NW25.C D11_NW25.A | length 7.2
  Top Layer w2: 147.75,55 D10_NW25.C@155,55
NetD10_NW26_C: D10_NW26.C D11_NW26.A | length 7.2
  Top Layer w2: 267.75,55 D10_NW26.C@275,55
NetD10_NW27_C: D10_NW27.C D11_NW27.A | length 7.2
  Top Layer w2: 187.75,55 D10_NW27.C@195,55
NetD10_NW28_C: D10_NW28.C D11_NW28.A | length 7.2
  Top Layer w2: 67.75,175 D10_NW28.C@75,175
NetD11_NW1_C: D11_NW1.C D12_NW1.A | length 7.3
  Top Layer w2: 257.75,10 D11_NW1.C@265,10
NetD11_NW2_C: D11_NW2.C D12_NW2.A | length 7.3
  Top Layer w2: 217.75,10 D11_NW2.C@225,10
NetD11_NW3_C: D11_NW3.C D12_NW3.A | length 7.3
  Top Layer w2: 177.75,10 D11_NW3.C@185,10
NetD11_NW4_C: D11_NW4.C D12_NW4.A | length 7.3
  Top Layer w2: 137.75,10 D11_NW4.C@145,10
NetD11_NW5_C: D11_NW5.C D12_NW5.A | length 7.3
  Top Layer w2: 97.75,10 D11_NW5.C@105,10
NetD11_NW6_C: D11_NW6.C D12_NW6.A | length 7.3
  Top Layer w2: 57.75,10 D11_NW6.C@65,10
NetD11_NW7_C: D11_NW7.C D12_NW7.A | length 7.3
  Top Layer w2: 17.75,10 D11_NW7.C@25,10
NetD11_NW8_C: D11_NW8.C D12_NW8.A | length 7.3
  Top Layer w2: 177.75,175 D11_NW8.C@185,175
NetD11_NW9_C: D11_NW9.C D12_NW9.A | length 7.3
  Top Layer w2: 97.75,175 D11_NW9.C@105,175
NetD11_NW10_C: D11_NW10.C D12_NW10.A | length 7.3
  Top Layer w2: 217.75,55 D11_NW10.C@225,55
NetD11_NW11_C: D11_NW11.C D12_NW11.A | length 7.3
  Top Layer w2: 257.75,175 D11_NW11.C@265,175
NetD11_NW12_C: D11_NW12.C D12_NW12.A | length 7.3
  Top Layer w2: 57.75,55 D11_NW12.C@65,55
NetD11_NW13_C: D11_NW13.C D12_NW13.A | length 7.3
  Top Layer w2: 17.75,55 D11_NW13.C@25,55
NetD11_NW14_C: D11_NW14.C D12_NW14.A | length 7.3
  Top Layer w2: 17.75,175 D11_NW14.C@25,175
NetD11_NW15_C: D11_NW15.C D12_NW15.A | length 7.3
  Top Layer w2: 17.75,130 D11_NW15.C@25,130
NetD11_NW16_C: D11_NW16.C D12_NW16.A | length 7.3
  Top Layer w2: 57.75,130 D11_NW16.C@65,130
NetD11_NW17_C: D11_NW17.C D12_NW17.A | length 7.3
  Top Layer w2: 97.75,130 D11_NW17.C@105,130
NetD11_NW18_C: D11_NW18.C D12_NW18.A | length 7.3
  Top Layer w2: 137.75,130 D11_NW18.C@145,130
NetD11_NW19_C: D11_NW19.C D12_NW19.A | length 7.3
  Top Layer w2: 177.75,130 D11_NW19.C@185,130
NetD11_NW20_C: D11_NW20.C D12_NW20.A | length 7.3
  Top Layer w2: 217.75,130 D11_NW20.C@225,130
NetD11_NW21_C: D11_NW21.C D12_NW21.A | length 7.3
  Top Layer w2: 257.75,130 D11_NW21.C@265,130
NetD11_NW22_C: D11_NW22.C D12_NW22.A | length 7.3
  Top Layer w2: 137.75,175 D11_NW22.C@145,175
NetD11_NW23_C: D11_NW23.C D12_NW23.A | length 7.3
  Top Layer w2: 97.75,55 D11_NW23.C@105,55
NetD11_NW24_C: D11_NW24.C D12_NW24.A | length 7.3
  Top Layer w2: 217.75,175 D11_NW24.C@225,175
NetD11_NW25_C: D11_NW25.C D12_NW25.A | length 7.3
  Top Layer w2: 137.75,55 D11_NW25.C@145,55
NetD11_NW26_C: D11_NW26.C D12_NW26.A | length 7.3
  Top Layer w2: 257.75,55 D11_NW26.C@265,55
NetD11_NW27_C: D11_NW27.C D12_NW27.A | length 7.3
  Top Layer w2: 177.75,55 D11_NW27.C@185,55
NetD11_NW28_C: D11_NW28.C D12_NW28.A | length 7.3
  Top Layer w2: 57.75,175 D11_NW28.C@65,175
NetD12_NW1_C: D12_NW1.C D12_NW2.C D12_NW3.C D12_NW4.C D12_NW5.C D12_NW6.C D12_NW7.C D12_NW8.C D12_NW9.C D12_NW10.C D12_NW11.C D12_NW12.C D12_NW13.C D12_NW14.C D12_NW15.C D12_NW16.C D12_NW17.C D12_NW18.C D12_NW19.C D12_NW20.C D12_NW21.C D12_NW22.C D12_NW23.C D12_NW24.C D12_NW25.C D12_NW26.C D12_NW27.C D12_NW28.C J1.4 | length 84
  Top Layer w1: D12_NW7.C@15,10 15,13 ; D12_NW13.C@15,55 15,58 ; D12_NW15.C@15,130 15,133 ; D12_NW14.C@15,175 15,178 ; D12_NW6.C@55,10 55,13 ; D12_NW12.C@55,55 55,58 ; D12_NW16.C@55,130 55,133 ; D12_NW28.C@55,175 55,178 ; D12_NW5.C@95,10 95,13 ; D12_NW23.C@95,55 95,58 ; D12_NW17.C@95,130 95,133 ; D12_NW9.C@95,175 95,178 ; D12_NW4.C@135,10 135,13 ; D12_NW25.C@135,55 135,58 ; D12_NW18.C@135,130 135,133 ; D12_NW22.C@135,175 135,178 ; D12_NW3.C@175,10 175,13 ; D12_NW27.C@175,55 175,58 ; D12_NW19.C@175,130 175,133 ; D12_NW8.C@175,175 175,178 ; D12_NW2.C@215,10 215,13 ; D12_NW10.C@215,55 215,58 ; D12_NW20.C@215,130 215,133 ; D12_NW24.C@215,175 215,178 ; D12_NW1.C@255,10 255,13 ; D12_NW26.C@255,55 255,58 ; D12_NW21.C@255,130 255,133 ; D12_NW11.C@255,175 255,178
NetJ1_2: J1.2 R1.2 | length 33.7
  Top Layer w0.3: R1.2@255,61 255,61.025 255.246,61.271 255.246,61.442 255.483,61.679 256.317,61.679 256.442,61.554 278.054,61.554 282,65.5 282,67.824 282.191,68.015 283.515,68.015 J1.2@284,68.5
NetJ1_3: J1.3 R1.1 | length 30
  Top Layer w0.3: R1.1@255.9,61 278.283,61 281.687,64.404 282.079,64.404 283.175,65.5 J1.3@284,65.5
NetJ2_2: J2.2 R2.2 | length 29.9
  Top Layer w0.3: R2.2@255,90 255,90.025 255.246,90.271 255.246,90.442 255.483,90.679 281.321,90.679 282.015,89.985 283.515,89.985 J2.2@284,89.5
NetJ2_3: J2.3 R2.1 | length 29.5
  Top Layer w0.3: R2.1@255.9,90 279.675,90 283.175,86.5 J2.3@284,86.5
NetJ3_2: J3.2 R3.2 | length 31
  Top Layer w0.3: R3.2@255,106 255,106.025 255.246,106.271 255.246,106.442 255.804,107 279,107 282.266,110.266 283.766,110.266 J3.2@284,110.5
NetJ3_3: J3.3 R3.1 | length 28.7
  Top Layer w0.3: R3.1@255.9,106 279,106 280.5,107.5 J3.3@284,107.5
pads on no net: J1.M J2.M J3.M

## Keep-outs
Keep-Out Layer:
  the board outline again, w0.5

## Other copper
Top Layer:
  rectangle net NetD1_WW1_A: 8,88.5 254,92
  rectangle net NetD8_CW1_C: 13.5,92.5 145.5,97
  rectangle net NetD8_CW1_C: 154.5,92.5 249.5,97
  rectangle net NetD8_CW1_C: 6,96.5 288,98
  rectangle net NetD9_NW1_A: 288.5,172.5 299,176.5
  rectangle net NetD12_NW1_C: 21.5,133.5 295.5,137.5
  rectangle net NetD1_WW1_A: 12.5,108 252,111.5
  rectangle net NetD5_CW1_A: 13.5,104 254,107.5
  rectangle net NetD12_NW1_C: 1,8.5 13,12.5
  rectangle net NetD8_CW1_C: 6.5,92.5 10.5,101.5
  rectangle net NetD8_CW1_C: 249,94 288,96.5
  rectangle net NetD9_NW1_A: 291,52.5 296.5,127.5
  rectangle net NetD12_NW1_C: 253.5,62.5 277.5,63.5
  rectangle net NetD12_NW1_C: 7.5,59.5 254,63.5
  rectangle net NetD1_WW1_A: 11,105 13,127
  rectangle net NetD4_WW1_C: 19,124 21,127
  rectangle net NetD4_WW1_C: 19,135 21,138
  rectangle net NetD4_WW1_C: 19,135 21,143
  rectangle net NetD4_WW1_C: 19,117 21,127
  rectangle net NetD4_WW1_C: 14,117 288,122.5
  rectangle net NetD1_WW1_A: 11,88 13,94
  rectangle net NetD5_CW1_A: 8,128 10,131
  rectangle net NetD5_CW1_A: 8,135 10,138
  rectangle net NetD5_CW1_A: 8,102 10,131
  rectangle net NetD5_CW1_A: 8,135 10,158
  rectangle net NetD4_WW1_C: 282,82 286,85
  region net NetD5_CW1_A: 23,75 23,77 20,77 20,75
  region net NetD5_CW1_A: 11,102 11,104 8,104 8,102
  rectangle net NetD5_CW1_A: 7.5,27 295.5,32.5
  rectangle net NetD5_CW1_A: 293.5,27 295.5,50.5
  rectangle net NetD5_CW1_A: 20,48.5 295.5,50.5
  rectangle net NetD5_CW1_A: 20,48.5 23,52
  region net NetD5_CW1_A: 23,50 23,52 20,52 20,50
  rectangle net NetD1_WW1_A: 8,53 10,56
  rectangle net NetD4_WW1_C: 11,49 13,52
  rectangle net NetD4_WW1_C: 11,73 13,76
  rectangle net NetD4_WW1_C: 11,43 13,52
  rectangle net NetD4_WW1_C: 11,73 13,81
  rectangle net NetD1_WW1_A: 8,36 10,56
  rectangle net NetD4_WW1_C: 11,42 293,48
  rectangle net NetD1_WW1_A: 8,33 293,38
  region net NetD8_CW1_C: 7,56 5,56 5,53 7,53
  rectangle net NetD8_CW1_C: 6,18 295.5,23
  rectangle net NetD8_CW1_C: 5,18 7,56
  rectangle net NetD8_CW1_C: 5,61 7,64
  rectangle net NetD1_WW1_A: 8,69 10,72
  rectangle net NetD1_WW1_A: 11,91 13,94
  rectangle net NetD1_WW1_A: 11,105 13,108
  rectangle net NetD8_CW1_C: 5,128 7,131
  rectangle net NetD1_WW1_A: 11,124 13,127
  rectangle net NetD1_WW1_A: 11,135 13,138
  rectangle net NetD8_CW1_C: 5,135 7,138
  rectangle net NetD1_WW1_A: 11,147 295.5,152.5
  rectangle net NetD1_WW1_A: 11,135 13,149
  rectangle net NetD8_CW1_C: 5,162 295.5,167.5
  rectangle net NetD8_CW1_C: 5,135 7,164
  rectangle net NetD1_WW1_A: 8,69 10,89
  rectangle net NetD5_CW1_A: 8,153 295.5,158
  rectangle net NetD4_WW1_C: 14,138 295.5,143
  rectangle net NetD8_CW1_C: 6,64 279,68
  rectangle net NetD5_CW1_A: 13.5,72 281.5,77
  rectangle net NetD5_CW1_A: 282,112 290,115
  rectangle net NetD5_CW1_A: 8,102 280,104.5
  rectangle net NetD8_CW1_C: 280.5,97 288,106
  rectangle net NetD8_CW1_C: 5,61 7,131
  rectangle net NetD1_WW1_A: 12,110.5 277.5,113
  rectangle net NetD4_WW1_C: 11,77.5 286,83
  rectangle net NetD1_WW1_A: 9,87 280,89
  rectangle net NetD12_NW1_C: 282,57 286,64
  rectangle net NetD9_NW1_A: 282,70 297,73
  rectangle net NetD9_NW1_A: 296,6 299,173
  rectangle net NetD12_NW1_C: 1,12 4,179
  rectangle net NetD12_NW1_C: 1,177 299,184
  rectangle net NetD12_NW1_C: 3,132 295.5,134
  rectangle net NetD12_NW1_C: 3,57 285,60
  rectangle net NetD12_NW1_C: 3,12 295.5,17.5
  region net NetD8_CW1_C: 154.5,92.5 154.5,93 ccw(c151,93) 151,96.5 151,97 155,97 155,92.5
  region net NetD8_CW1_C: 145.5,92.5 145.5,93 cw(c149,93) 149,96.5 149,97 145,97 145,92.5
  region net NetD9_NW1_A: 299,173 299,168 5,168 5,173
  region net NetD9_NW1_A: 299,128 299,123 22,123 22,128
  region net NetD9_NW1_A: 299,53 299,51 46,51 46,53
  region net NetD9_NW1_A: 299,8 299,1 1,1 1,8

## Silkscreen, mask and mechanical layers (free items; w line width, h text height)
Top Overlay:
  lines w0.2: 6,56.5 6,60.5 ; 6,131.5 6,134.5 ; 9,56.5 9,68.5 ; 9,101.5 9,92.113 ccw(c22.552,92.113) 12.969,82.531 13.207,82.293 19.5,76 ccw(c19.5,68.757) 14.379,73.879 13.5,73 ccw(c15.914,70.586) 12.5,70.586 12.5,53.707 ccw(c14.207,53.707) 13,52.5 ccw(c16.621,56.121) 16.621,51 19.5,51 ; 9,131.5 9,134.5 ; 12,52.5 12,72.5 ; 12,94.5 12,104.5 ; 12,127.5 12,134.5 ; 18.5,125.5 17.828,125.5 cw(c17.828,132.328) 13,127.5 cw(c14.207,128.707) 12.5,128.707 12.5,132.293 cw(c14.207,132.293) 13,133.5 14.232,134.732 cw(c18.5,130.464) 18.5,136.5 ; 0.5,48 23.5,48 23.5,52.5 14.5,52.5 cw(c14.5,54) 13,54 13,71 cw(c14.5,71) 14.5,72.5 23.5,72.5 23.5,82.5 14.5,82.5 cw(c14.5,84) 13,84 13,87.793 cw(c14.707,87.793) 13.5,89 ccw(c12.293,90.207) 14,90.207 14,95 14,95.793 cw(c15.207,97) 13.5,97 13.5,108.5 13.5,117 cw(c15,117) 15,118.5 19.5,118.5 ccw(c19.5,121) 22,121 22,127.5 14.5,127.5 cw(c14.5,129) 13,129 13,131 cw(c14.5,131) 14.5,132.5 19,132.5 ccw(c19,135) 21.5,135 21.5,138.5 0.5,138.5 0.5,48 ; 19,124 21,124 21,127 19,127 19,124 ; 19,135 21,135 21,138 19,138 19,135
Jumper Outline:
  lines w0.2: 6,54.5 6,62.5 ; 6,129.5 6,136.5 ; 9,54.5 9,70.5 ; 9,129.5 9,136.5 ; 12,50.5 12,74.5 ; 12,92.5 12,106.5 ; 12,125.5 12,136.5 ; 20,125.5 20,136.5 ; 0.5,48 0.5,138.5 21.5,138.5 21.5,135 cw(c19,135) 19,132.5 14.5,132.5 ccw(c14.5,131) 13,131 13,129 ccw(c14.5,129) 14.5,127.5 22,127.5 22,121 cw(c19.5,121) 19.5,118.5 15,118.5 ccw(c15,117) 13.5,117 13.5,108.5 13.5,97 ccw(c15.207,97) 14,95.793 14,95 14,90.207 cw(c12.293,90.207) 13.5,89 ccw(c14.707,87.793) 13,87.793 13,84 ccw(c14.5,84) 14.5,82.5 23.5,82.5 23.5,72.5 14.5,72.5 ccw(c14.5,71) 13,71 13,54 ccw(c14.5,54) 14.5,52.5 23.5,52.5 23.5,48 0.5,48 ; 5,53 5,56 7,56 7,53 5,53 ; 5,61 5,64 7,64 7,61 5,61 ; 5,128 7,128 7,131 5,131 5,128 ; 5,135 5,138 7,138 7,135 5,135 ; 8,53 8,56 10,56 10,53 8,53 ; 8,69 8,72 10,72 10,69 8,69 ; 8,102 8,104 11,104 11,102 8,102 ; 8,128 10,128 10,131 8,131 8,128 ; 8,135 8,138 10,138 10,135 8,135 ; 11,49 11,52 13,52 13,49 11,49 ; 11,73 13,73 13,76 11,76 11,73 ; 11,91 11,94 13,94 13,91 11,91 ; 11,105 11,108 13,108 13,105 11,105 ; 11,124 13,124 13,127 11,127 11,124 ; 11,135 11,138 13,138 13,135 11,135 ; 19,124 19,127 21,127 21,124 19,124 ; 19,135 19,138 21,138 21,135 19,135 ; 20,50 20,52 23,52 23,50 20,50 ; 20,75 20,77 23,77 23,75 20,75